# EAGLE board akabeacon_square_type2_MDBT40 (EAGLE 7.4.0)
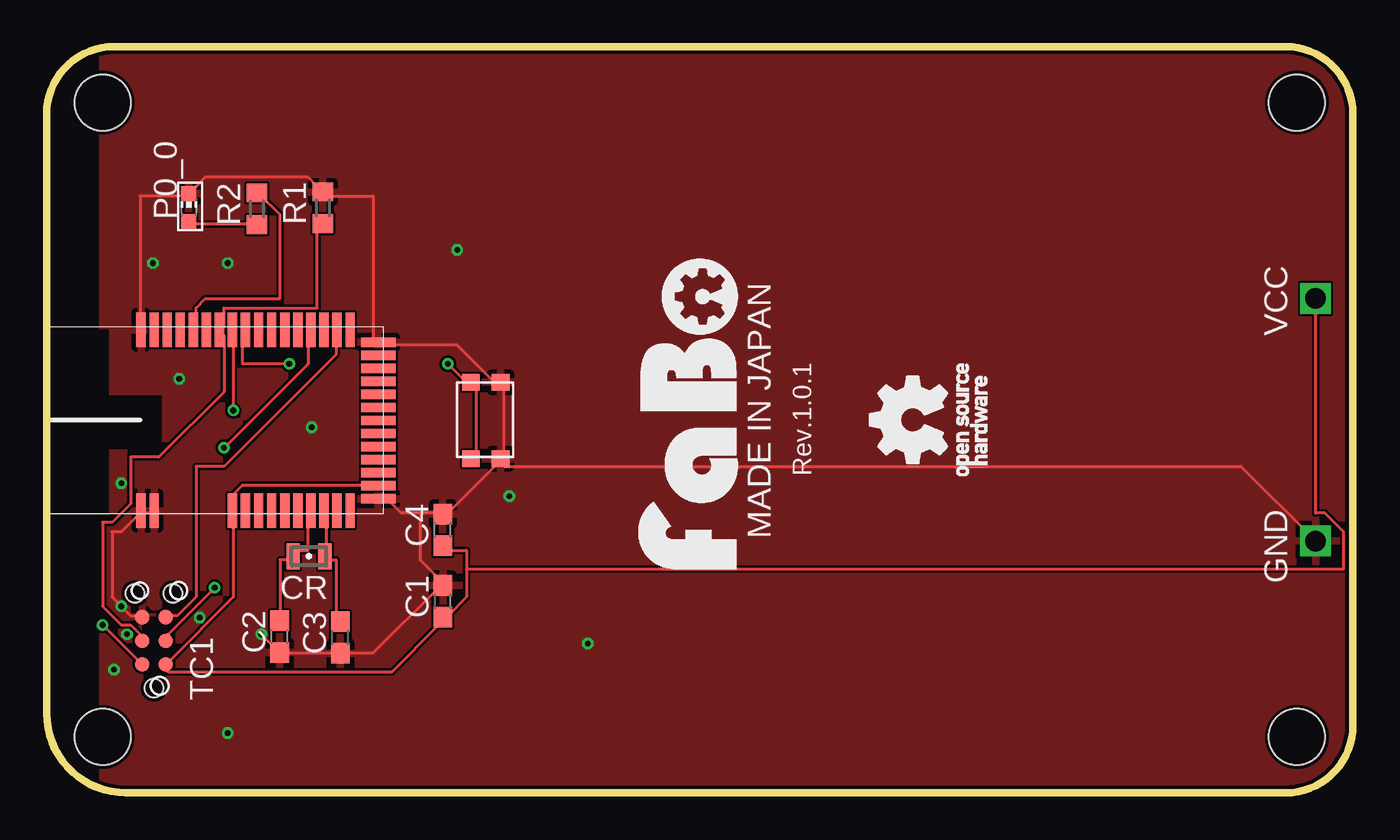
[diagram p0: board, top side]
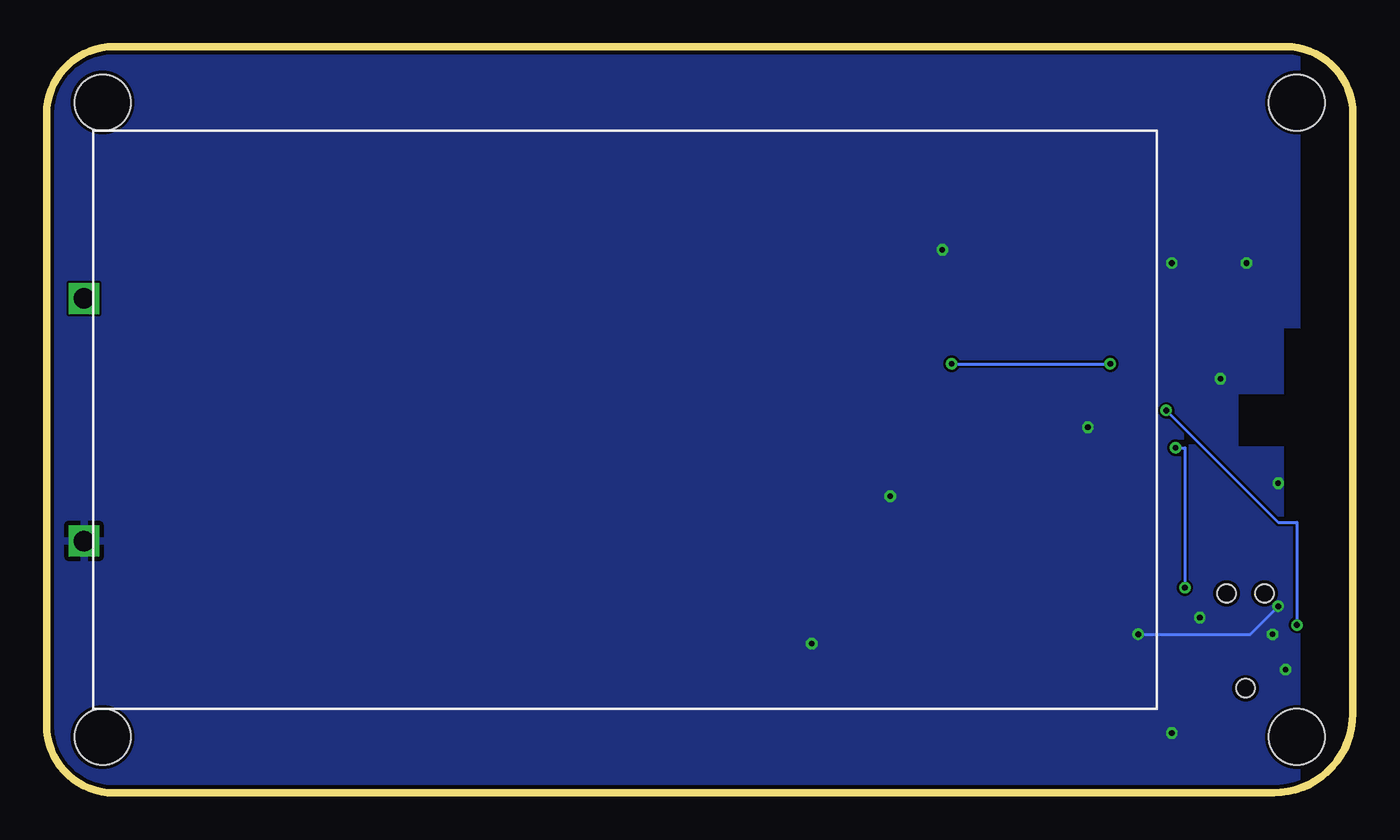
[diagram p1: board, bottom side, seen from below]

Size 70 x 40 mm. Coordinates in mm from the lower left corner, seen from the top.
Copper layers (1*16): Top 0.035mm / dielectric 1.5mm / Bottom 0.035mm
Design rules "SeeedStudio_2layer_DRU_no_angle_20140221 *": minimum track width 6mil, minimum drill 12mil, track to track 5mil, track to pad 5mil, pad to pad 5mil, via to via 5mil, smd to smd 0mil, copper to edge 8mil, drill to drill 8mil, minimum pad ring 10mil, minimum via ring 6mil, stop-mask expansion 2mil, vias tented up to drill 100mil, thermal gap 10mil
tRestrict: area -1.3,14.7 to 3.3,24.8; area 3.4,18.4 to 6.2,21.3
bRestrict: area -1.3,14.7 to 3.7,24.9; area 3.2,18.6 to 6.1,21.4

## Footprints (pad centres in the part's own frame; a part is rotated, then mirrored left to right if it is on the bottom)
C0603 = smd 1.1 x 1: 1 -0.85,0; 2 0.85,0
FC-12M = smd 0.7 x 1.4: 1 -0.85,0; 2 0.85,0
CHIP-LED0603 = smd 0.8 x 0.8: A 0,-0.75; C 0,0.75
R0603 = smd 1 x 1.1: 1 -0.85,0; 2 0.85,0
TC2030-IDC-NL = smd 0.787 x 0.787: 1 -1.27,-0.635; 2 -1.27,0.635; 3 0,-0.635; 4 0,0.635; 5 1.27,-0.635; 6 1.27,0.635 | hole 0.991: -2.54,0; 2.54,1.016; 2.54,-1.016
SQUARE-TYPE2-TC2030 = drill 1.1 square: GND 33,-6.5; VCC 33,6.5 | hole 3: -32,17; -32,-17; 32,-17; 32,17
RAYTAC-MDBT40 = smd 1.85 x 0.5: 1 -4.86,4; 2 -4.86,3.3; 3 -4.86,-0.9; 4 -4.86,-1.6; 5 -4.86,-2.3; 6 -4.86,-3; 7 -4.86,-3.7; 8 -4.86,-4.4; 9 -4.86,-5.1; 10 -4.86,-5.8; 11 -4.86,-6.5; 12 -4.86,-7.2; 26 4.84,-7.2; 27 4.84,-6.5; 28 4.84,-5.8; 29 4.84,-5.1; 30 4.84,-4.4; 31 4.84,-3.7; 32 4.84,-3; 33 4.84,-2.3; 34 4.84,-1.6; 35 4.84,-0.9; 36 4.84,-0.2; 37 4.84,0.5; 38 4.84,1.2; 39 4.84,1.9; 40 4.84,2.6; 41 4.84,3.3; 42 4.84,4 | smd 0.5 x 1.85: 13 -4.22,-8.71; 14 -3.52,-8.71; 15 -2.82,-8.71; 16 -2.12,-8.71; 17 -1.42,-8.71; 18 -0.72,-8.71; 19 -0.02,-8.71; 20 0.68,-8.71; 21 1.38,-8.71; 22 2.08,-8.71; 23 2.78,-8.71; 24 3.48,-8.71; 25 4.18,-8.71
SWITCH-4P(KMR2) = smd 0.9 x 0.95: 1 -1,0; 2 3.1,0; 3 -1,-1.6; 4 3.1,-1.6

## Placement (x,y rotation side)
C1  [C0603]  21.24,10.27 90 top
C2  [C0603]  12.49,8.38 90 top
C3  [C0603]  15.74,8.33 90 top
C4  [C0603]  21.23,14.09 90 top
CR  [FC-12M]  14.06,12.68 180 top
P0_0  [CHIP-LED0603]  7.62,31.38 0 top
R1  10K  [R0603]  14.8,31.36 90 top
R2  [R0603]  11.27,31.31 90 top
TC1  [TC2030-IDC-NL]  5.75,8.15 90 top
U$2  SQUARE-TYPE2-TC2030  [SQUARE-TYPE2-TC2030]  35,20 0 top
U$3  RAYTAC-MDBT40  [RAYTAC-MDBT40]  9.06,19.98 90 top
U$6  SWICTH-4P(KMR2)  [SWITCH-4P(KMR2)]  22.73,18.91 90 top

## Library data of the parts
C1-C4 R1 R2 = adafruit
CR = crystal
P0_0 = led
TC1 = TagConnect
U$2 = FaBo-Template
U$3 = gclueBT
U$6 = gclue-test

## Nets
+3V3: C1.1 C4.1 TC1.1 U$2.VCC U$3.3 U$3.14
GND: C1.2 C2.1 C3.1 C4.2 P0_0.C R1.2 TC1.6 U$2.GND U$3.1 U$3.2 U$3.13 U$3.25 U$3.42 U$6.3 U$6.4
N$1: P0_0.A R2.1
N$7: C2.2 CR.2 U$3.9
N$8: C3.2 CR.1 U$3.10
P0_00: U$3.17
P0_01: U$3.18
P0_02: U$3.19
P0_03: U$3.20
P0_04: U$3.21
P0_05: U$3.22
P0_06: U$3.23
P0_07: U$3.24
P0_08: U$3.26
P0_09: TC1.5 U$3.27
P0_10: U$3.28
P0_11: TC1.3 U$3.29
P0_12: U$3.30
P0_13: U$3.31
P0_14: U$3.32
P0_15: U$3.33
P0_16: U$3.34 U$6.1 U$6.2
P0_18: R2.2 U$3.38
P0_19: U$3.39
P0_21: U$3.4
P0_22: U$3.5
P0_23: U$3.6
P0_24: U$3.7
P0_25: U$3.8
P0_28: U$3.11
P0_29: U$3.12
P0_30: U$3.16
SWCLK: R1.1 TC1.4 U$3.36
SWDIO: TC1.2 U$3.35

## Tracks (layer width: path | path; a pad name or v marks a point on that pad's centre or on a via)
+3V3
  Top 0.152: 22.5,12 22.5,13 21.5,13 C4.1 | 22.5,12 22.5,10.5 21.5,9.5 C1.1 21,9 18.5,6.5 6.5,6.5 TC1.1 6.5,7 10,10.5 10,15 U$3.3 10,15.5 10,16 10.5,16.5 17.5,16.5 U$3.14 | U$2.VCC 68,15 68.5,15 69.5,14 69.5,12 22.5,12
GND  (via drill 0.3)
  Top 0.152: 5,15 4,14 3.5,14 3.5,10.5 v4,10 4.5,9.5 5,9.5 TC1.6 | 5,15 6,15 U$3.2 | 5,15 U$3.1 | v11.5,8.5 12,8 C2.1 12.5,7.5 15.5,7.5 C3.1 16,7.5 17.5,7.5 21,11 C1.2 21,11.5 20,12.5 20,15 | U$3.42 5,25 5,32 7.5,32 P0_0.C 8,32.5 8.5,33 14,33 14.5,32.5 R1.2 15,32 17.5,32 17.5,24 U$3.25 18,24 22,24 24,22 U$6.4 24.5,22 24.5,18 U$6.3 | U$6.3 24,17.5 21.5,15 C4.2 21,15 20,15 | 20,15 19,15 18,16 U$3.13 | U$2.GND 64,17.5 24.5,17.5 U$6.3
  Bottom 0.152: v4,10 5.5,8.5 v11.5,8.5
  other vias: 29,8 14.2,19.6 3.6,6.6 4,16.6 8.2,9.4 4.3,8.5 7.1,22.2 5.7,28.4 9.7,28.4 9.7,3.2 24.8,15.9 22,29.1
  pour Top: 3,0 70,0 70,40 3,40
  pour Bottom: 4,0 70,0 70,40 3,40 3,0
N$1
  Top 0.152: P0_0.A 8,30.5 11,30.5 R2.1
N$7
  Top 0.152: C2.2 12.5,9.5 12.5,12.5 13,12.5 CR.2 13.5,13 14,13 14,15 U$3.9
N$8
  Top 0.152: C3.2 15.5,9.5 15.5,12.5 15,12.5 CR.1 15,13 15,15 U$3.10
P0_09
  Top 0.152: TC1.5 6.5,9.5 7,9.5 8,10.5 8,17.5 9.5,17.5 15.5,23.5 15.5,24.5 U$3.27
P0_11  (via drill 0.3)
  Top 0.152: v9,11 6.5,8.5 TC1.3 | v9.5,18.5 14,23 14,24.5 U$3.29
  Bottom 0.152: v9,11 9,18.5 v9.5,18.5
P0_16  (via drill 0.3)
  Top 0.152: U$6.1 23,18 23,22 U$6.2 22.5,22 v21.5,23 | v13,23 10.5,23 10.5,24.5 U$3.34
  Bottom 0.152: v21.5,23 v13,23
P0_18
  Top 0.152: R2.2 11.5,32 12.5,31 12.5,26.5 8.5,26.5 8,26 8,25 U$3.38
SWCLK
  Top 0.152: TC1.4 5,8.5 4.5,9 4,9 3,10 3,14.5 3.5,14.5 4.5,15.5 4.5,18 6,18 9.5,21.5 9.5,24.5 U$3.36 9.5,25 9.5,26 14.5,26 14.5,30.5 R1.1
SWDIO  (via drill 0.3)
  Top 0.152: v3,9 5,7 TC1.2 | v10,20.5 10,24.5 U$3.35
  Bottom 0.152: v3,9 3,14.5 4,14.5 v10,20.5

## Text on the board
tPlace: Rev.1.0.1